# EAGLE board tm4cShield_v1.1 (EAGLE 7.6.0)
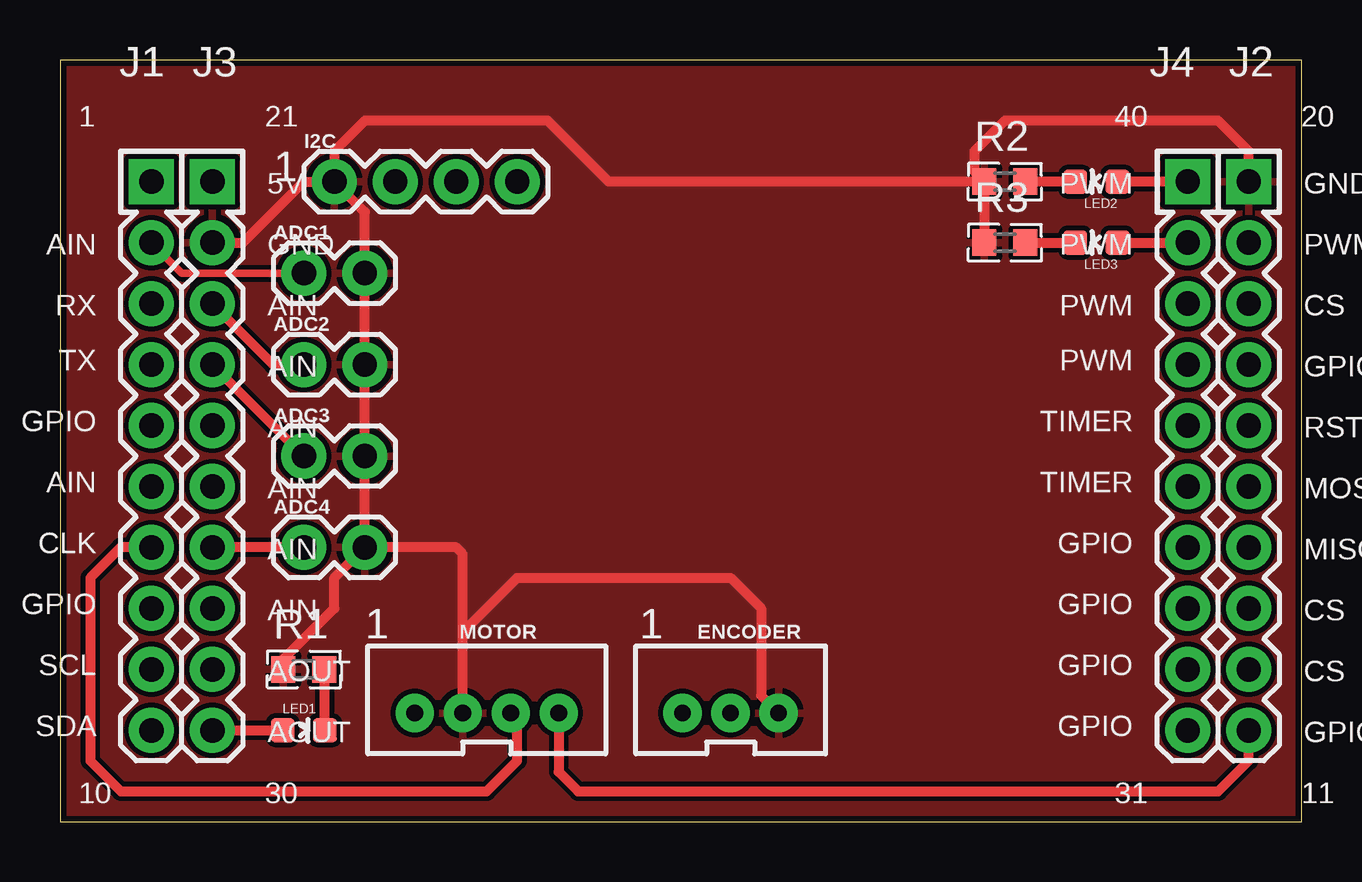
[diagram p0: board, top side]
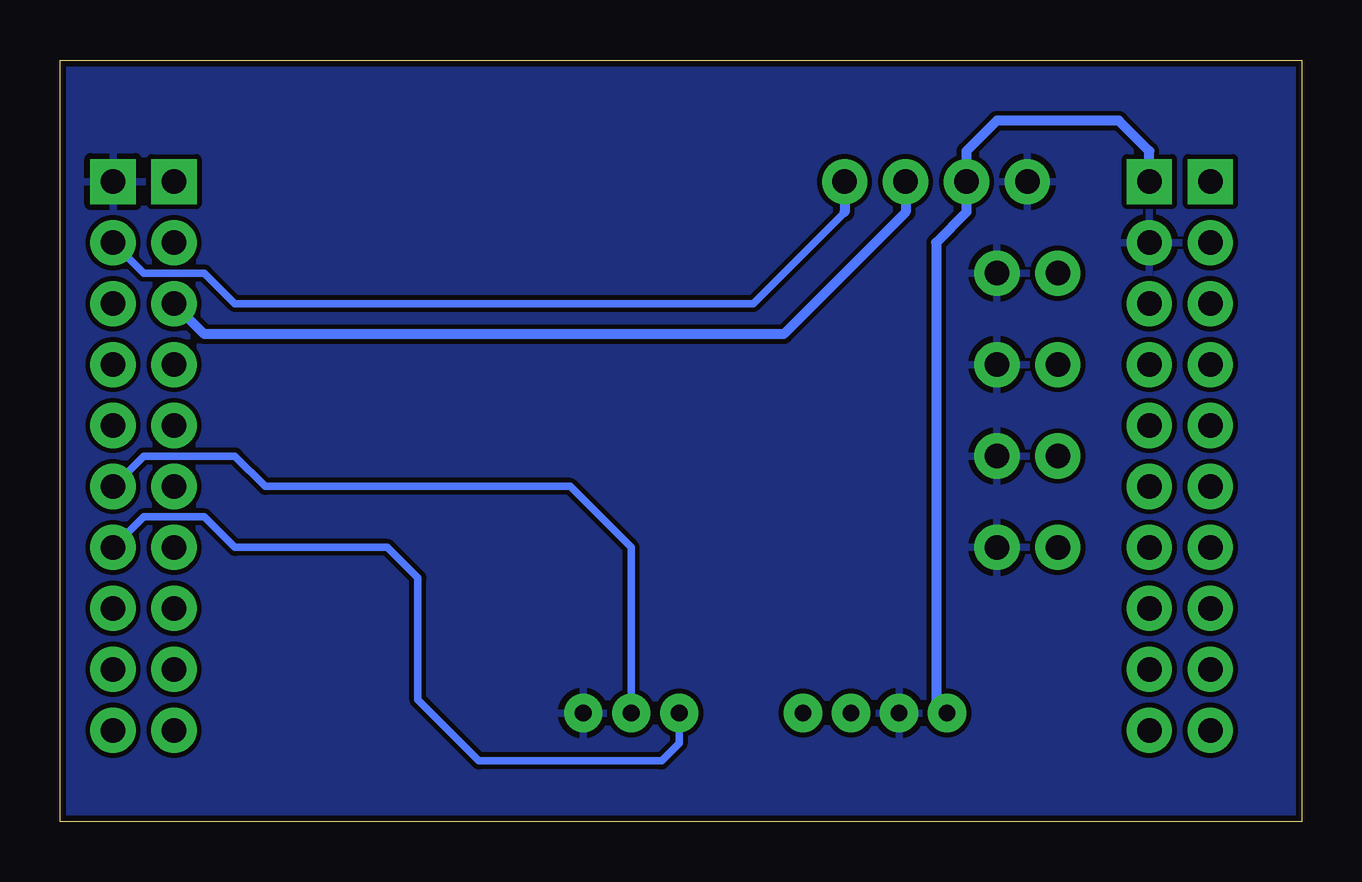
[diagram p1: board, bottom side, seen from below]

Size 51.74 x 31.74 mm. Coordinates in mm from the lower left corner, seen from the top.
Outline: 0,0 51.74,0 51.74,31.74 0,31.74 0,0
Copper layers (1*16): Top 0.035mm / dielectric 1.5mm / Bottom 0.035mm
Design rules "SparkFun": minimum track width 8mil, minimum drill 20mil, track to track 8mil, track to pad 8mil, pad to pad 8mil, via to via 8mil, smd to smd 8mil, copper to edge 10mil, drill to drill 8mil, minimum pad ring 12mil, minimum via ring 10mil, stop-mask expansion 4mil, vias tented up to drill 25mil, thermal gap 10mil

## Footprints (pad centres in the part's own frame; a part is rotated, then mirrored left to right if it is on the bottom)
4X10-BOOSTERPACK = drill 1.016 pad 1.88 square: 1 0,10.16; 20 45.72,10.16; 21 2.54,10.16; 40 43.18,10.16 | drill 1.016 pad 1.88: 2 0,7.62; 3 0,5.08; 4 0,2.54; 5 0,0; 6 0,-2.54; 7 0,-5.08; 8 0,-7.62; 9 0,-10.16; 10 0,-12.7; 11 45.72,-12.7; 12 45.72,-10.16; 13 45.72,-7.62; 14 45.72,-5.08; 15 45.72,-2.54; 16 45.72,0; 17 45.72,2.54; 18 45.72,5.08; 19 45.72,7.62; 22 2.54,7.62; 23 2.54,5.08; 24 2.54,2.54; 25 2.54,0; 26 2.54,-2.54; 27 2.54,-5.08; 28 2.54,-7.62; 29 2.54,-10.16; 30 2.54,-12.7; 31 43.18,-12.7; 32 43.18,-10.16; 33 43.18,-7.62; 34 43.18,-5.08; 35 43.18,-2.54; 36 43.18,0; 37 43.18,2.54; 38 43.18,5.08; 39 43.18,7.62
1X02 = drill 1.016 pad 1.88: 1 0,0; 2 2.54,0
JST-3-PTH-VERT = drill 0.7 pad 1.6: 1 -2,-0.55; 2 0,-0.55; 3 2,-0.55
1X04 = drill 1.016 pad 1.88: 1 0,0; 2 2.54,0; 3 5.08,0; 4 7.62,0
LED-0603 = smd 1 x 1: A 0,-0.877; C 0,0.877
JST-4-PTH-VERT = drill 0.7 pad 1.6: 1 -3,-0.55; 2 -1,-0.55; 3 1,-0.55; 4 3,-0.55
RESC0603 = smd 1 x 1.1: 1 -0.85,0; 2 0.85,0

## Placement (x,y rotation side)
A1  [4X10-BOOSTERPACK]  3.81,16.51 0 top
ADC1  [1X02]  10.16,22.86 0 top
ADC2  [1X02]  10.16,19.05 0 top
ADC3  [1X02]  10.16,15.24 0 top
ADC4  [1X02]  10.16,11.43 0 top
ENCODER  [JST-3-PTH-VERT]  27.94,5.08 0 top
I2C  [1X04]  11.43,26.67 0 top
LED1  [LED-0603]  10.16,3.81 270 top
LED2  [LED-0603]  43.18,26.67 90 top
LED3  [LED-0603]  43.18,24.13 90 top
MOTOR  [JST-4-PTH-VERT]  17.78,5.08 0 top
R1  [RESC0603]  10.16,6.35 0 top
R2  [RESC0603]  39.37,26.67 0 top
R3  [RESC0603]  39.37,24.13 0 top

## Library data of the parts
A1 LED1-LED3 R1-R3 = EAGLE_BoosterPack_Library
ADC1-ADC4 I2C = SparkFun-Connectors
ENCODER = SparkFun-Connectors; PROD_ID: CONN-13230
MOTOR = SparkFun-Connectors; PROD_ID: CONN-13251

## Nets
3.3V: A1.1
5V: A1.21 I2C.2 MOTOR.1
GND: A1.20 A1.22 ADC1.2 ADC2.2 ADC3.2 ADC4.2 ENCODER.3 I2C.1 MOTOR.2 R1.1 R2.1 R3.1
N$2: LED1.C R1.2
N$4: A1.3
N$5: A1.4
N$6: LED2.C R2.2
N$7: LED3.C R3.2
N$8: A1.5
N$9: A1.6
N$11: A1.8
N$12: A1.9
N$13: A1.10
N$18: A1.25
N$19: A1.26
N$21: A1.28
N$22: A1.29
N$27: A1.37
N$28: A1.36
N$29: A1.35
N$30: A1.34
N$31: A1.33
N$32: A1.32
N$33: A1.31
N$36: A1.18
N$37: A1.17
N$38: A1.16
N$41: A1.13
N$42: A1.12
PA2: A1.11 MOTOR.4
PB2: A1.19 I2C.4
PB3: A1.38 I2C.3
PB4: A1.7 MOTOR.3
PB5: A1.2 ADC1.1
PB6: A1.14 ENCODER.1
PB7: A1.15 ENCODER.2
PD0: A1.23 ADC2.1
PD1: A1.24 ADC3.1
PE1: A1.27 ADC4.1
PF1: A1.30 LED1.A
PF2: A1.40 LED2.A
PF3: A1.39 LED3.A

## Tracks (layer width: path | path; a pad name or v marks a point on that pad's centre or on a via)
5V
  Bottom 0.406: A1.21 6.35,27.94 7.62,29.21 12.7,29.21 13.97,27.94 I2C.2 13.97,25.4 15.24,24.13 15.24,4.99 MOTOR.1
GND
  Top 0.406: A1.22 7.62,24.13 10.16,26.67 I2C.1 | R1.1 9.31,6.77 11.43,8.89 11.43,10.16 ADC4.2 | ADC4.2 ADC3.2 ADC2.2 ADC1.2 12.7,25.4 I2C.1 | R2.1 R3.1 | R2.1 22.86,26.67 20.32,29.21 12.7,29.21 11.43,27.94 I2C.1 | ADC4.2 16.51,11.43 16.78,11.16 MOTOR.2 16.78,7.89 19.05,10.16 27.94,10.16 29.21,8.89 29.21,5.26 ENCODER.3 | A1.20 49.53,27.94 48.26,29.21 39.37,29.21 38.1,27.94 38.1,27.09 R2.1
  pour Top: 0,31.75 51.82,31.75 51.82,24.64 51.82,0 0,0 0,1.78
  pour Bottom: 0,31.75 51.82,31.75 51.82,0 0,0
N$2
  Top 0.406: LED1.C 11.04,6.32 R1.2
N$6
  Top 0.406: LED2.C R2.2
N$7
  Top 0.406: R3.2 LED3.C
PA2
  Top 0.406: MOTOR.4 20.78,2.08 21.59,1.27 48.26,1.27 49.53,2.54 A1.11
PB2
  Bottom 0.305: 19.05,25.4 22.86,21.59 44.45,21.59 45.72,22.86 48.26,22.86 A1.19
  Bottom 0.406: I2C.4 19.05,25.4
PB3
  Bottom 0.406: I2C.3 16.51,25.4 21.59,20.32 45.72,20.32 A1.38
PB4
  Top 0.406: A1.7 2.54,11.43 1.27,10.16 1.27,2.54 2.54,1.27 17.78,1.27 19.05,2.54 19.05,4.26 MOTOR.3
PB5
  Top 0.305: A1.2 5.08,22.86 ADC1.1
PB6
  Bottom 0.305: ENCODER.1 25.94,3.27 26.67,2.54 34.29,2.54 36.83,5.08 36.83,10.16 38.1,11.43 44.45,11.43 45.72,12.7 48.26,12.7 A1.14
PB7
  Bottom 0.305: ENCODER.2 27.94,11.43 30.48,13.97 43.18,13.97 44.45,15.24 48.26,15.24 A1.15
PD0
  Top 0.406: ADC2.1 8.89,19.05 A1.23
PD1
  Top 0.406: ADC3.1 A1.24
PE1
  Top 0.406: ADC4.1 A1.27
PF1
  Top 0.406: A1.30 LED1.A
PF2
  Top 0.406: A1.40 LED2.A
PF3
  Top 0.406: LED3.A A1.39

## Text on the board
tPlace: 1 | 1 | 1